# Altium PCB PCB8.PcbDoc
Units mil, origin at the board's own origin, x right, y up, seen from the top; angles counter-clockwise.
Board outline 3206 x 2037 mil, 2 copper layers (Top Layer, Bottom Layer); 87 components, 65 nets, 274 pads, 64 vias.
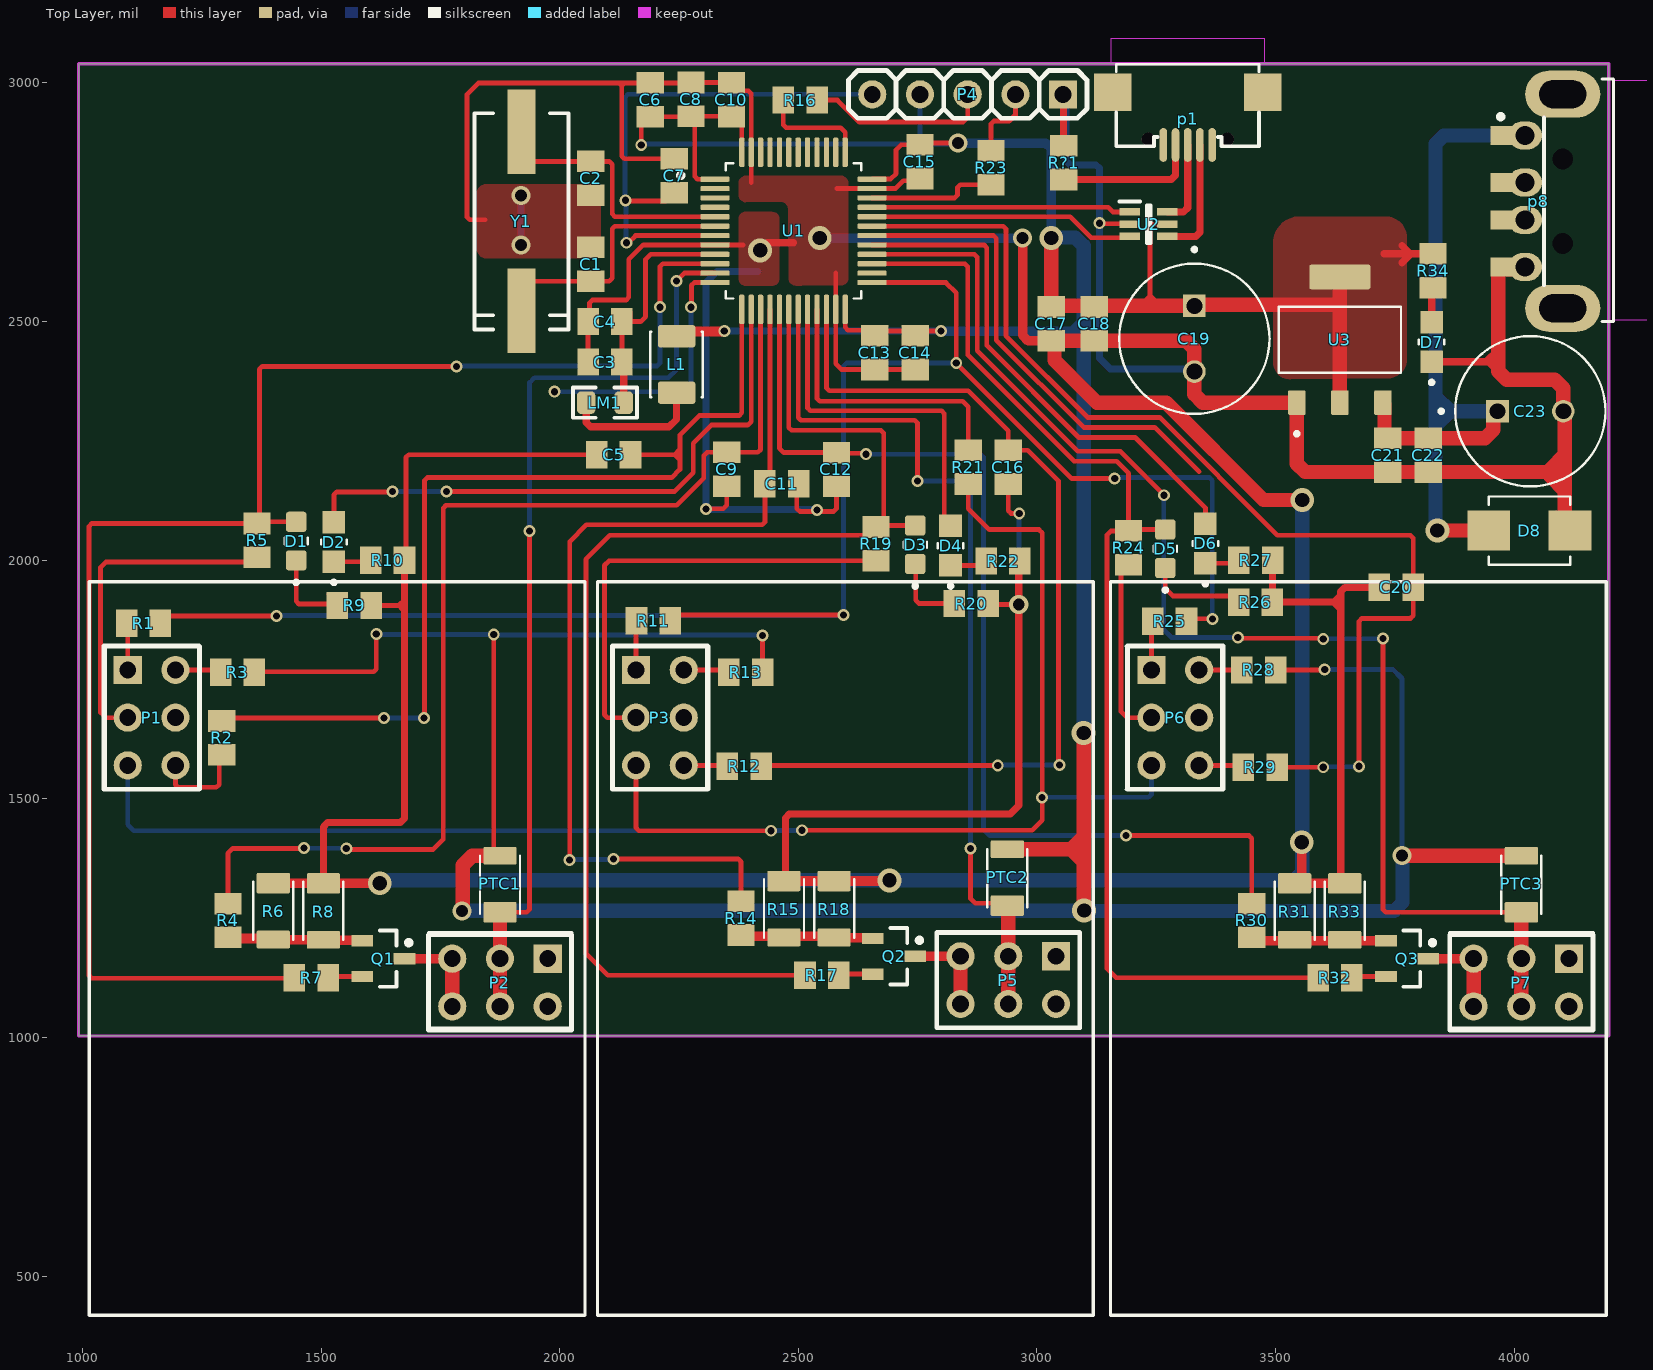
[diagram p0: Top Layer view]
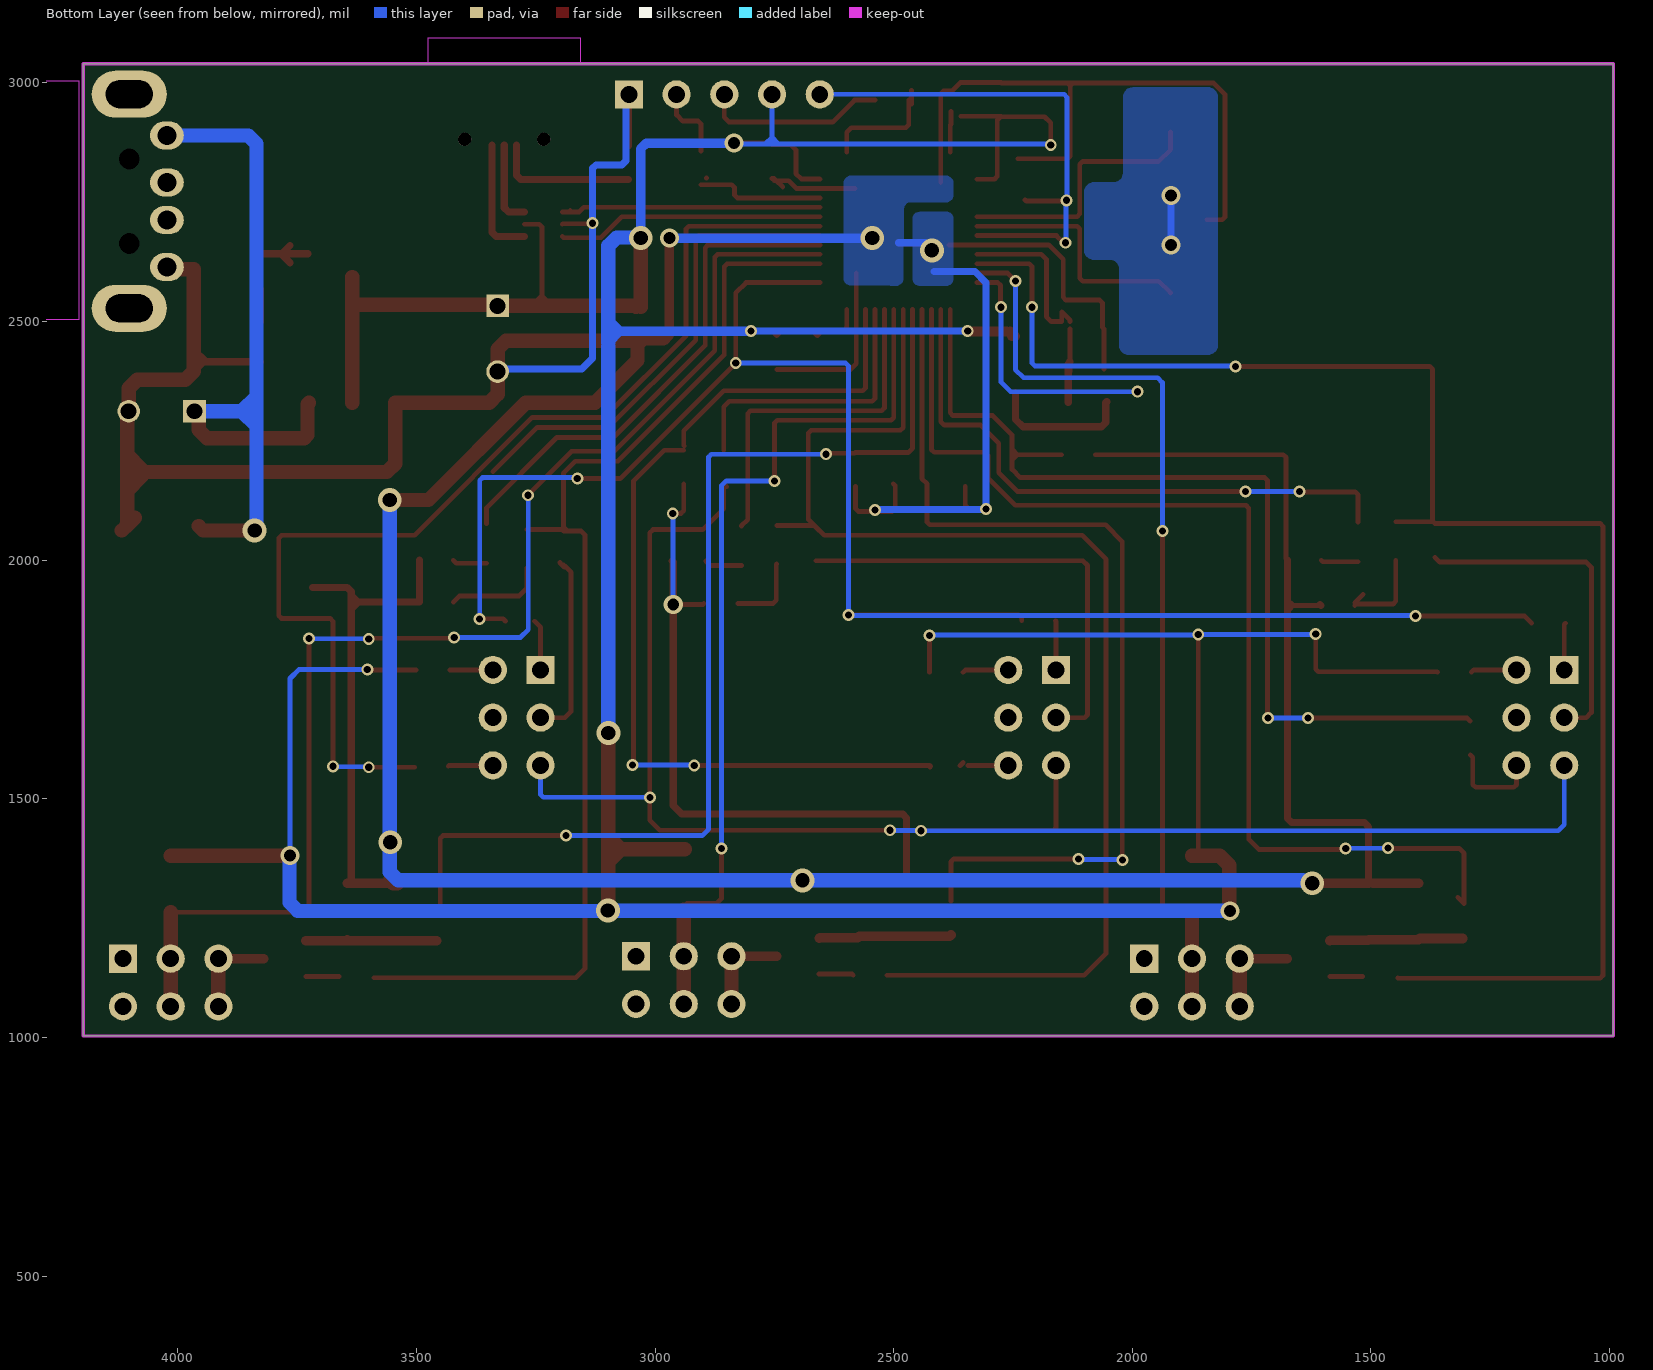
[diagram p1: Bottom Layer view, seen from below]

## Layer stack, top to bottom
Top Solder: solder mask 0.4, Solder Resist, Dk 3.5
Top Layer: signal copper 1.4
Dielectric 1: dielectric 12.6, FR-4, Dk 4.8
Bottom Layer: signal copper 1.4
Bottom Solder: solder mask 0.4, Solder Resist, Dk 3.5

## Board outline
992,1003 992,3040 4198,3040 4198,1003

## Design rules (kind name [scope] priority, off if disabled: settings)
Clearance [All] p1: gap=10 ignorepadtopadclearanceinfootprint=FALSE except(0: Arc-Hole Track-Hole SMDPad-Hole THPad-Hole Via-Hole Fill-Hole Poly-Hole Region-Hole Text-Hole; 5: Arc-SMDPad Track-SMDPad SMDPad-SMDPad; 15: Arc-Poly Track-Poly SMDPad-Poly THPad-Poly Via-Poly Fill-Poly Poly-Poly)
PlaneClearance [All] p1: clearance=15
PlaneConnect [All] p1: planeconnectstyle=Direct reliefexpansion=20 reliefentries=4 reliefconductorwidth=10 reliefairgap=10
PolygonConnect [All] p1: connectstyle=Direct reliefconductorwidth=10 reliefentries=4 polygonreliefangle="90 Angle" airgapwidth=10
RoutingVias [All] p1: holewidth=15 width=25 viastyle="Through Hole" minholewidth=15 minwidth=25 maxholewidth=30 maxwidth=50
SolderMaskExpansion [All] p1: expansion=4 istentingtop=FALSE
Width [All] p1: maxlimit=30 minlimit=10 preferedwidth=10 minimp=50.000000 maximp=50.000000 favimp=50.000000
28 further rules are at their usual default settings.

## Components (designator, comment, footprint, x,y, rotation, side; value= is the part's Value field where it differs from the comment)
C1 "Cap" CAPC2012X140N 2065,2620 r90 top value=30uF (schematic designator C7)
C2 "Cap" CAPC2012X140N 2065,2800 r270 top value=30uF (schematic designator C6)
C3 "Cap" CAPC2012X140N 2095,2415 r0 top value=10nF (schematic designator C4)
C4 "Cap" CAPC2012X140N 2095,2500 r0 top value=100nF (schematic designator C5)
C5 "Cap" CAPC2012X140N 2113,2221 r0 top value=10pF (schematic designator C26)
C6 "Cap" CAPC2012X140N 2190,2964.57 r270 top value=4.7uF (schematic designator C13)
C7 "Cap" CAPC2012X140N 2240,2805.43 r90 top value=10nF (schematic designator C30)
C8 "Cap" CAPC2012X140N 2275,2965.43 r270 top value=100nF (schematic designator C9)
C9 "0.1uF" CAPC2012X140N 2350,2190.43 r90 top (schematic designator C1)
C10 "Cap" CAPC2012X140N 2360,2965 r270 top value=100nF
C11 "0.1uF" CAPC2012X140N 2465.43,2160 r180 top (schematic designator C2)
C12 "0.1uF" CAPC2012X140N 2580,2190 r90 top (schematic designator C3)
C13 "Cap" CAPC2012X140N 2660,2435 r90 top value=100nF (schematic designator C12)
C14 "Cap" CAPC2012X140N 2745,2435 r90 top value=100nF (schematic designator C8)
C15 "Cap" CAPC2012X140N 2755,2835 r90 top value=100nF (schematic designator C11)
C16 "Cap" CAPC2012X140N 2940,2195 r270 top value=10nF (schematic designator C20)
C17 "Cap" CAPC2012X140N 3030,2495 r90 top value=10uF (schematic designator C18)
C18 "Cap" CAPC2012X140N 3120,2495 r90 top value=100nF (schematic designator C19)
C19 "EEUFR1C681L" CAPPRD350W60D800H1500 3330,2463.9 r270 top (schematic designator C15)
C20 "Cap" CAPC2012X140N 3753,1943 r0 top value=10pF (schematic designator C29)
C21 "Cap" CAPC2012X140N 3735,2220 r90 top value=100nF (schematic designator C17)
C22 "Cap" CAPC2012X140N 3820,2220 r90 top value=10uF (schematic designator C16)
C23 "EEUFR1C681L" CAPPRD350W60D800H1500 4034,2312 r0 top (schematic designator C14)
D1 "5990110007F" LEDSC125X200X90-2N 1448,2040 r90 top
D2 "Q62702P5179" LED_Q62702P5179 1527,2038 r90 top (schematic designator D7)
D3 "5990110007F" LEDSC125X200X90-2N 2745,2032.35 r90 top (schematic designator D2)
D4 "Q62702P5179" LED_Q62702P5179 2819,2030.34 r90 top (schematic designator D8)
D5 "5990110007F" LEDSC125X200X90-2N 3269,2024 r90 top (schematic designator D3)
D6 "" LED_Q62702P5179 3353,2035 r90 top
D7 "Q62702P5179" LED_Q62702P5179 3827,2457 r90 top (schematic designator D5)
D8 "SMBJ5.0CA" DIOM4336X265N 4032,2062 r180 top (schematic designator D4)
L1 "NLCV32T-2R2M-PF" INDM3225X240N 2245,2410 r270 top value=2µ2
LM1 "10uH" 0805L 2095,2330 r0 top value=FB805
p1 "USB Connector" USB_AB_BM_SHS 3316,2929 r0 top (schematic designator p?)
P1 "Header 3X2" FHDR2X03-254P 1095,1770 r270 top (schematic designator P3)
P2 "Header 3X2" FHDR2X03-254P 1975,1165 r180 top
P3 "Header 3X2" FHDR2X03-254P 2160,1770 r270 top (schematic designator P5)
P4 "MHDR_1X05" MHDR1X05-254P 3055,2976 r180 top (schematic designator P1)
P5 "Header 3X2" FHDR2X03-254P 3040,1170 r180 top (schematic designator P4)
P6 "Header 3X2" FHDR2X03-254P 3240,1770 r270 top
P7 "Header 3X2" FHDR2X03-254P 4115,1165 r180 top
p8 "USB Connector" "USB A TYPE Right Angle" 4208,2752 r0 top
PTC1 "0.65ohm" RESC3115X65N 1875,1320 r90 top
PTC2 "0.65ohm" RESC3115X65N 2938,1333.68 r90 top
PTC3 "0.65ohm" RESC3115X65N 4015,1320 r90 top
Q1 "MOSFET-N" SOT23_N 1630.71,1165 r0 top
Q2 "MOSFET-N" SOT23_N 2700.71,1170 r0 top
Q3 "MOSFET-N" SOT23_N 3775.71,1165 r0 top
R1 "Res1" CAPC2012X140N 1128,1868 r180 top value=150ohm (schematic designator R9)
R2 "Res1" CAPC2012X140N 1292,1627.43 r90 top value=150ohm (schematic designator R7)
R3 "Res1" CAPC2012X140N 1325,1765 r0 top value=4.7K (schematic designator R11)
R4 "1K" CAPC2012X140N 1305,1245 r90 top (schematic designator R2)
R5 "Res1" CAPC2012X140N 1366,2041.43 r90 top value=150ohm (schematic designator R8)
R6 "1ohm" RESC3115X65N 1400,1265.63 r270 top (schematic designator R13)
R7 "Res1" CAPC2012X140N 1479.57,1125 r180 top value=4.7K (schematic designator R10)
R8 "1ohm" RESC3115X65N 1505,1265 r270 top (schematic designator R14)
R9 "Res1" CAPC2012X140N 1569.57,1905 r0 top value=150ohm (schematic designator R12)
R10 "Res1" CAPC2012X140N 1639.57,2000 r180 top value=150ohm (schematic designator R39)
R11 "Res1" CAPC2012X140N 2196.43,1873 r180 top value=150ohm (schematic designator R22)
R12 "Res1" CAPC2012X140N 2387,1568 r0 top value=150ohm (schematic designator R16)
R13 "Res1" CAPC2012X140N 2390,1765 r0 top value=4.7K (schematic designator R21)
R14 "1K" CAPC2012X140N 2380,1250 r90 top (schematic designator R4)
R15 "1ohm" RESC3115X65N 2470,1270 r270 top (schematic designator R26)
R16 "22ohm" CAPC2012X140N 2504,2964 r0 top (schematic designator R3)
R17 "Res1" CAPC2012X140N 2549.57,1130 r180 top value=4.7K (schematic designator R23)
R18 "1ohm" RESC3115X65N 2575,1270 r270 top (schematic designator R25)
R19 "Res1" CAPC2012X140N 2663,2034 r90 top value=150ohm (schematic designator R17)
R20 "Res1" CAPC2012X140N 2862.43,1909 r180 top value=150ohm (schematic designator R24)
R21 "Res1" CAPC2012X140N 2856,2195 r90 top value=150ohm (schematic designator R15)
R22 "Res1" CAPC2012X140N 2929,1998 r180 top value=150ohm (schematic designator R40)
R23 "22ohm" CAPC2012X140N 2904,2822 r90 top (schematic designator R1)
R24 "Res1" CAPC2012X140N 3192,2026 r90 top value=150ohm (schematic designator R29)
R25 "Res1" CAPC2012X140N 3278,1872 r180 top value=150ohm (schematic designator R30)
R26 "Res1" CAPC2012X140N 3458,1912 r180 top value=150ohm (schematic designator R32)
R27 "Res1" CAPC2012X140N 3458.43,2000 r180 top value=150ohm (schematic designator R38)
R28 "Res1" CAPC2012X140N 3465,1770 r0 top value=4.7K (schematic designator R31)
R29 "Res1" CAPC2012X140N 3468,1566 r0 top value=150ohm (schematic designator R28)
R30 "1K" CAPC2012X140N 3450,1245 r90 top (schematic designator R5)
R31 "1ohm" RESC3115X65N 3540,1265 r270 top (schematic designator R35)
R32 "Res1" CAPC2012X140N 3624.57,1125 r180 top value=4.7K (schematic designator R33)
R33 "1ohm" RESC3115X65N 3645,1265 r270 top (schematic designator R34)
R34 "Res1" CAPC2012X140N 3830,2606.57 r270 top value=150ohm (schematic designator R37)
R?1 "Res1" CAPC2012X140N 3056,2833 r90 top value=10K (schematic designator R?)
U1 "STM32F103C8T6" QFP50P900X900X160-48N 2490,2690 r0 top
U2 "USBUF02W6" SOT65P210X110-6N 3234,2704 r0 top
U3 "AMS1117-3.3" SOT229P700X180-4N 3634.84,2461.69 r90 top
Y1 "XTAL" "Crystal SMD" 1920,2710 r90 top

## Footprints (in the part's own frame and the unit in brackets; to place one, negate y for a bottom-side part, rotate by r counter-clockwise, add the part's x,y. Pads: shape width x height; smd on the part's side, far side on the other; paste and mask are expansions set on the pad)
0805L [mm] ",0805, 2012, 200X130"
  rrect50% 1x1.2 smd mask+0.075: 1(-1,0) 2(1,0)
  Top Layer pour cut-out: -0.5,0.8 0.5,0.8 0.5,-0.8 -0.5,-0.8
  silkscreen extent -1.7,-0.8 1.7,0.8, body extent -1,-0.6 1,0.6, height 0.95
CAPC2012X140N [mm]
  rect 1.15x1.45 smd: 1(-0.9,0) 2(0.9,0)
  body extent -1,-0.63 1,0.63, height 0.94
CAPPRD350W60D800H1500 [mm]
  round 1.2 hole 0.85: N(1.75,0)
  rect 1.2x1.2 / inner round 1.2 / far side rect 1.2x1.2 hole 0.85: P(-1.75,0)
  silkscreen extent -4.85,-4 4,4, body extent -4,-4 4,4, height 15
"Crystal SMD" [mm]
  rect 4.5x1.5 smd: 1(-4.763,0) 2(4.763,0)
  silkscreen extent -5.75,-2.5 5.75,2.5, body extent -6.94,-2.5 6.96,2.5, height 4.5
DIOM4336X265N [mm]
  rect 2.28x2.12 smd: 1(-2.165,0) 2(2.165,0)
  silkscreen extent -2.16,-1.81 2.16,1.81, body extent -2.68,-1.81 2.68,1.81, height 2.65
FHDR2X03-254P [mm] "Female Header 2X03 with 2.54 mm Pitch"
  rect 1.5x1.5 hole 0.9: 1(0,0)
  round 1.5 hole 0.9: 2(0,2.54) 3(2.54,0) 4(2.54,2.54) 5(5.08,0) 6(5.08,2.54)
  silkscreen extent -1.27,-1.27 6.35,3.81
INDM3225X240N [mm] "Molded Inductor, 2-Leads, Body 3.2x2.5mm, IPC Medium Density"
  round 0.508 on Mech15: 0(0,0)
  rrect25% 1.2x2 smd: 1(-1.5,0) 2(1.5,0)
  silkscreen extent -1.75,-1.4 1.75,1.4, body extent -1.79,-1.35 1.79,1.35, height 2.4
LED_Q62702P5179 [mm]
  rect 1.2x1.2 smd: 1(-1.05,0) 2(1.05,0)
  silkscreen extent -2.25,-0.67 0.13,0.67, body extent -1,-0.65 1,0.65, height 0.8
LEDSC125X200X90-2N [mm]
  rrect25% 1.07x1.08 smd: A(1.025,0) C(-1.025,0)
  silkscreen extent -2.3,-0.63 0.17,0.63, body extent -1,-0.63 1,0.63, height 0.7
MHDR1X05-254P [mm] "Male Header 1X05 with 2.54 mm Pitch"
  rect 1.5x1.5 hole 0.9: 1(0,0)
  round 1.5 hole 0.9: 2(2.54,0) 3(5.08,0) 4(7.62,0) 5(10.16,0)
  silkscreen extent -1.27,-1.27 11.43,1.27, body extent -1.27,-1.27 11.43,1.27, height 8.43
QFP50P900X900X160-48N [mm]
  rrect50% 1.56x0.28 smd: 1(-4.18,2.75) 2(-4.18,2.25) 3(-4.18,1.75) 4(-4.18,1.25) 5(-4.18,0.75) 6(-4.18,0.25) 7(-4.18,-0.25) 8(-4.18,-0.75) 9(-4.18,-1.25) 10(-4.18,-1.75) 11(-4.18,-2.25) 12(-4.18,-2.75) 25(4.18,-2.75) 26(4.18,-2.25) 27(4.18,-1.75) 28(4.18,-1.25) 29(4.18,-0.75) 30(4.18,-0.25) 31(4.18,0.25) 32(4.18,0.75) 33(4.18,1.25) 34(4.18,1.75) 35(4.18,2.25) 36(4.18,2.75)
  rrect50% 0.28x1.56 smd: 13(-2.75,-4.18) 14(-2.25,-4.18) 15(-1.75,-4.18) 16(-1.25,-4.18) 17(-0.75,-4.18) 18(-0.25,-4.18) 19(0.25,-4.18) 20(0.75,-4.18) 21(1.25,-4.18) 22(1.75,-4.18) 23(2.25,-4.18) 24(2.75,-4.18) 37(2.75,4.18) 38(2.25,4.18) 39(1.75,4.18) 40(1.25,4.18) 41(0.75,4.18) 42(0.25,4.18) 43(-0.25,4.18) 44(-0.75,4.18) 45(-1.25,4.18) 46(-1.75,4.18) 47(-2.25,4.18) 48(-2.75,4.18)
  silkscreen extent -6.15,-3.6 3.6,3.6, body extent -4.5,-4.5 4.5,4.5, height 1.6
RESC3115X65N [mm]
  rrect14% 1.09x1.77 smd: 1(-1.465,0)
  rrect14% 0.94x1.77 smd: 2(1.54,0)
  silkscreen extent -1.55,-1.06 1.55,1.06
SOT23_N [mm] "SOT23, 3-Leads, Body 2.9x1.3mm, Pitch 0.95mm, Lead Span 2.3mm - Reverse Pinning, IPC Medium Density"
  rect 1.15x0.6 smd: 1(1.125,0) 2(-1.125,-0.95) 3(-1.125,0.95)
  silkscreen extent -0.2,-1.5 1.48,1.5, body extent -0.7,-1.5 0.7,1.5, height 1.1
SOT65P210X110-6N [mm]
  rect 1.1x0.4 smd: 1(-1,0.65) 2(-1,0) 3(-1,-0.65) 4(1,-0.65) 5(1,0) 6(1,0.65)
  silkscreen extent -1.55,-1 0.1,1.2
SOT229P700X180-4N [mm]
  rrect15% 1.31x0.93 smd: 1(-3.345,2.29) 2(-3.345,0) 3(-3.345,-2.29)
  rrect15% 1.31x3.24 smd: 4(3.345,0)
  silkscreen extent -5.1,-3.25 1.75,3.25, body extent -3.5,-3.25 3.5,3.25, height 1.8
"USB A TYPE Right Angle" [mm] "Connector; USB1.1, Type A, SM; 4 Position; Right Angle DESIGNER ABBAS BASEREH"
  rect 2.5x1 smd: 1(-5.3,3.5) 2(-5.3,1) 3(-5.3,-1) 4(-5.3,-3.5)
  oval 1.8x1.5 hole 1: 1(-4.7,3.5) 2(-4.7,1) 3(-4.7,-1) 4(-4.7,-3.5)
  oval 4x2.5 hole 1.5 slot 2.5 at 0 deg: 5(-2.7,-5.7) 6(-2.7,5.7)
  round 0.8 hole 1.1 unplated: MH1(-2.7,-2.25) MH2(-2.7,2.25)
  Keep-Out Layer board cut-out: 0,6.4 0,-6.3 15.3,-6.3 15.3,6.4
  silkscreen extent -6.12,-6.4 0,6.5, body extent -4.9,-6.3 15.1,6.3, height 3.45
USB_AB_BM_SHS [mm] "USB Micro AB - Standard (Bottom mount), Shell SMT DESIGNER ABBAS BASEREH"
  oval 0.4x1.8 smd: 1(1.3,-1.5) 2(0.65,-1.5) 3(0,-1.5) 4(-0.65,-1.5) 5(-1.3,-1.5)
  rect 2x2 smd: 6(-4,1.3) 6(4,1.3)
  round 0.7 hole 0.7: H(-2.1,-1.2) H(2.1,-1.2)
  Keep-Out Layer board cut-out: -4.064,2.8 -4.064,4.191 4.064,4.191 4.064,2.8
  silkscreen extent -3.8,-1.57 3.8,2.8, body extent -4,-1.88 4,4.16, height 2.75

## Part data
C1 C2 C3 C4 C5 C6 C7 C8 C10 C13 C14 C15 C16 C17 C18 C20 C21 C22: "Capacitor", LatestRevisionDate=17-Jul-2002, LatestRevisionNote="Re-released for DXP Platform.", PackageDescription="Radial Cap, Thru-Hole; 2 Leads; 0.3 in Pin Spacing", PackageReference=RAD-0.3, Published=8-Jun-2000, Publisher="Altium Limited"
C9 C11 C12: library part "CAP SMD 0805", "CAP 0805", Data=16-12-2016, Desc.="CAP SMD 0805", Designer="Abbas Basereh"
C19 C23: "680ÂµF 16V Aluminum Electrolytic Capacitors Radial, Can 8000 Hrs @ 105Â°C", Package="RADIAL-2 Panasonic", Availability="In Stock", Check_prices=https://www.snapeda.com/parts/EEUFR1C681L/Panasonic/view-part/?ref=eda, MF=Panasonic, MP=EEUFR1C681L, Price=None, Purchase-URL=https://pricing.snapeda.com/search/part/EEUFR1C681L/?ref=eda, SnapEDA_Link=https://www.snapeda.com/parts/EEUFR1C681L/Panasonic/view-part/?ref=snap
D1 D3 D5: "Red 633nm LED Indication - Discrete 2.1V 0805 (2012 Metric)", Package="0805 Dialight", Availability="In Stock", Check_prices=https://www.snapeda.com/parts/599-0110-007F/Dialight/view-part/?ref=eda, MF=Dialight, MP=599-0110-007F, Price=None, Purchase-URL=https://pricing.snapeda.com/search/part/599-0110-007F/?ref=eda, SnapEDA_Link=https://www.snapeda.com/parts/599-0110-007F/Dialight/view-part/?ref=snap
D2 D4 D7: "LED Uni-Color Green 572nm 2-Pin SMD T/R", Package="0805 Osram Opto", Availability="In Stock", Check_prices=https://www.snapeda.com/parts/Q62702P5179/Osram+Opto/view-part/?ref=eda, MF="Osram Opto", MP=Q62702P5179, Price=None, SnapEDA_Link=https://www.snapeda.com/parts/Q62702P5179/Osram+Opto/view-part/?ref=snap
D6: library part Q62702P5179, "LED Uni-Color Green 572nm 2-Pin SMD T/R", Package="0805 Osram Opto", Availability="In Stock", Check_prices=https://www.snapeda.com/parts/Q62702P5179/Osram+Opto/view-part/?ref=eda, MF="Osram Opto", MP=Q62702P5179, Price=None, SnapEDA_Link=https://www.snapeda.com/parts/Q62702P5179/Osram+Opto/view-part/?ref=snap
D8: "600W, 6.7V, 5%, Bidirectional, TVS", Package="SMB Taiwan Semiconductor", Availability="In Stock", Check_prices=https://www.snapeda.com/parts/SMBJ5.0CA/Taiwan+Semiconductor/view-part/?ref=eda, MF="Taiwan Semiconductor", MP=SMBJ5.0CA, Price=None, Purchase-URL=https://pricing.snapeda.com/search/part/SMBJ5.0CA/?ref=eda, SnapEDA_Link=https://www.snapeda.com/parts/SMBJ5.0CA/Taiwan+Semiconductor/view-part/?ref=snap
L1: library part "Inductor 2.2µH 770mA 1210", "2.2µH Unshielded Wirewound Inductor 770mA 169 mOhm Max 1210 (3225 Metric)", DC Resistance (DCR)="169 mOhm", Frequency - Self Resonant=68MHz, Frequency - Test=7.96MHz, Manufacturer 1="TDK Corporation", Operating Temperature="-40°C ~ 125°C", Package / Case="1210 (3225 Metric)", Q @ Freq="15 @ 7.96MHz", Tolerance=±20%, ComponentLink1Description=http://www.digikey.com/products/en/inductors-coils-chokes/4, ComponentLink1URL=http://www.digikey.com/products/en/inductors-coils-chokes/4, Manufacturer Part Number 1=NLCV32T-2R2M-PF, SCDType=source, Supplier 1=Digi-Key, Type="Ferrite Core"
LM1: library part "L SMA 0.25W", "Inductor", Code_IEC=1005, Code_JEITA=0402, LatestRevisionDate=29-May-2009, LatestRevisionNote="IPC-7351 Footprint Added.", PackageDescription="Chip Inductor", PackageReference=0402-A, Published=8-Jun-2000, Publisher="Altium Limited"
p1: library part "USB AB MICRO CONNECTOR", "USB MICRO-B Type Connector", Max Current=1600mA, Category=Connector, ComponentLink1Description=Datasheet, ComponentLink2Description=Reference, Designer="ABBAS BASEREH", Mounting Technology="Surface Mount\Through-Hole", Pin Count=5-7, Publisher="ABBAS BASEREH", Status=Unreleased, Update=1395-11-17
P1 P2 P3 P5 P6 P7: "Header, 3-Pin, Dual row", LatestRevisionDate=17-Jul-2002, LatestRevisionNote="Re-released for DXP Platform.", Publisher="Altium Limited"
P4: "Male Header 1X05"
p8: library part "USB A CONNECTOR", "USB Connector-A Type", Max Current=600mA, Category=Connector, ComponentLink1Description=Datasheet, ComponentLink2Description=Reference, Designer="ABBAS BASEREH", Mounting Technology="Surface Mount\Through-Hole", Pin Count=4-6, Publisher="ABBAS BASEREH", Status=Unreleased, Update=1395-11-17
PTC1 PTC2 PTC3 R6 R8 R15 R18 R31 R33: library part "RES 1206 0.25W", "RES 1206", Data=16-12-2016, Desc.="RES SMD 1206", Designer="Abbas Basereh"
Q1 Q2 Q3: "N-Channel MOSFET", LatestRevisionDate=17-Jul-2002, LatestRevisionNote="Re-released for DXP Platform.", PackageDescription="TO, Flat Index; 3 In-Line, Axial Leads; Body Dia. 4.6mm; Lead Dia. 0.5 mm (max)", PackageReference=E3, PackageVersion=1995/1996, Published=8-Jun-2000, Publisher="Altium Limited"
R1 R2 R3 R5 R7 R9 R10 R11 R12 R13 R17 R19 R20 R21 R22 R24 R25 R26 R27 R28 R29 R32 R34 R?1: "Resistor", LatestRevisionDate=17-Jul-2002, LatestRevisionNote="Re-released for DXP Platform.", PackageDescription="Axial Device, Thru-Hole; 2 Leads; 0.3 in Pin Spacing", PackageReference=AXIAL-0.3, Published=8-Jun-2000, Publisher="Altium Limited"
R4 R14 R16 R23 R30: library part "RES 0805 0.125W", "RES 0805", Data=16-12-2016, Desc.="RES SMD 0805", Designer="Abbas Basereh"
U1: "ARMÂ® CortexÂ®-M3 STM32F1 Microcontroller IC 32-Bit 72MHz 64KB (64K x 8) FLASH 48-LQFP (7x7)", Package="LQFP-48 STMicroelectronics", Availability="In Stock", Check_prices=https://www.snapeda.com/parts/STM32F103C8T6/STMicroelectronics/view-part/?ref=eda, MF=STMicroelectronics, MP=STM32F103C8T6, Price=None, Purchase-URL=https://pricing.snapeda.com/search/part/STM32F103C8T6/?ref=eda, SnapEDA_Link=https://www.snapeda.com/parts/STM32F103C8T6/STMicroelectronics/view-part/?ref=snap
U2: Manufacturer_Name=STMicroelectronics, Mouser Part Number=511-USBUF02W6, Arrow Part Number=USBUF02W6, Arrow Price/Stock=https://www.arrow.com/en/products/usbuf02w6/stmicroelectronics?region=nac, Datasheet Link=http://www.st.com/web/en/resource/technical/document/datasheet/CD00002046.pdf, Geometry.Height=1.1mm, Manufacturer_Part_Number=USBUF02W6, Mouser Price/Stock=https://www.mouser.co.uk/ProductDetail/STMicroelectronics/USBUF02W6?qs=po45yt2pPpsSshudxXreiQ%3D%3D
U3: "Sot223/Pkg 1-Amp 3.3-Volt Low Drop Out Voltage Regulatator", Package="SOT-223 Seeed Technology", Availability="Not in stock", Check_prices=https://www.snapeda.com/parts/AMS1117-3.3/Advanced+Monolithic+Systems/view-part/?ref=eda, MF="Advanced Monolithic Systems", MP=AMS1117-3.3, Price=None, SnapEDA_Link=https://www.snapeda.com/parts/AMS1117-3.3/Advanced+Monolithic+Systems/view-part/?ref=snap
Y1: "Crystal Oscillator", LatestRevisionDate=17-Jul-2002, LatestRevisionNote="Re-released for DXP Platform.", PackageDescription="Crystal, Thru-Hole; 2 Leads; Body 3.1 x 8.2 mm (Dia.xH)", PackageReference=R38, Published=8-Jun-2000, Publisher="Altium Limited"

## Via types
v1: diameter 25, hole 15, Top Layer to Bottom Layer, 47 vias
v2: diameter 50, hole 30, Top Layer to Bottom Layer, 10 vias
v3: diameter 40, hole 25, Top Layer to Bottom Layer, 7 vias

## Nets (pads, with @x,y where several pads share a name; then routed paths per layer and width w, separated by ;. In a path a pad name is that pad's centre, name@x,y a point inside that pad or via, vN(x,y) a via of type N, cw(c..) or ccw(c..) an arc to the next point about the centre after c; other vN are vias at no path point)
ADC1: Q3.3 R30.1 R31.2 R33.2 | length 277
  Top Layer w20: R30.1@3457.17,1202.4 R33.2@3646.97,1202.4 ; R33.2 R33.2@3646.97,1202.4 ; Q3.3 R33.2@3646.97,1202.4
ADC1-M: C12.2 R30.2 U1.17 | length 2212.6
  Top Layer w10: U1.17 2460.47,2234.53 2469.57,2225.43 C12.2 2581.43,2224 2640,2224 v1(2642,2222) ; v1(3187,1423) 3444.14,1423 3450,1417.14 R30.2
  Bottom Layer w10: v1(2642,2222) 2882,2222 2888,2216 2888,1436 2901,1423 v1(3187,1423)
ADC2: Q1.3 R4.1 R6.2 R8.2 | length 281.2
  Top Layer w20: R4.1@1307.28,1207.28 1397.72,1207.28 R6.2 1400.31,1204.69 1504.68,1204.69 R8.2 1505.98,1203.39 1585.43,1203.39 Q1.3
ADC2-M: C9.2 R4.2 U1.15 | length 2320.8
  Top Layer w10: R4.2@1318,1293.43 R4.2 1305,1386 1315,1396 1463,1396 v1(1464,1397) ; v1(1553,1396) 1555,1394 1735.11,1394 1756,1414.89 1756,2109.14 1761.86,2115 2245,2115 2302,2172 2302,2219 2308.87,2225.87 C9.2 2415.24,2225.87 2421.1,2231.72 U1.15
  Bottom Layer w10: v1(1464,1397) 1464.5,1396.5 1552.5,1396.5 v1(1553,1396)
ADC3: Q2.3 R14.1 R15.2 R18.2 | length 279.4
  Top Layer w20: R14.1 2382.6,1211.97 2572.4,1211.97 R18.2 2575.98,1208.39 2655.43,1208.39 Q2.3
ADC3-M: C11.2 R14.2 U1.16 | length 1987.9
  Top Layer w10: v1(2021,1372) 2021,2039 2056,2074 2424.14,2074 2430,2079.86 C11.2 2440.79,2170.79 U1.16 ; v1(2113,1374) 2374.14,1374 2380,1368.14 R14.2
  Bottom Layer w10: v1(2021,1372) 2022,1373 2112,1373 v1(2113,1374)
Boot: R1.1 R11.1 R25.1 U1.25 | length 3889
  Top Layer w10: R1.1 1178.43,1883 v1(1407,1883) ; R11.1 2231.87,1878.91 2237.96,1885 v1(2595,1885) ; U1.25 2809.27,2581.73 2831,2560 v1(2831,2413) 3073,2171 v1(3163,2171) ; R25.1 3318.43,1877 v1(3368,1877)
  Bottom Layer w10: v1(1407,1883) 1408,1884 2594,1884 v1(2595,1885) 2595,2407.14 2600.86,2413 v1(2831,2413) ; v1(3163,2171) 3165,2173 3361.44,2173 3367.3,2167.14 v1@3367.3,1877.7
DNeg: p1.2 U2.4 | length 254.6
  Top Layer w15: U2.4 3332.8,2678.41 3341.59,2687.2 p1.2
DPos: p1.3 U2.6 | length 177.8
  Top Layer w15: U2.6 3307.21,2729.59 3316,2738.38 p1.3
EN1: D5.A R24.2 R32.2 U1.27 | length 2433.5
  Top Layer w10: U1.27 2849.14,2621.1 2855,2615.24 2855,2430 3078,2207 3167,2207 3192,2182 R24.2@3192,2065.43 ; R24.2@3188,2065.43 R24.2 3191.57,2061 3188,2061 3155,2061 3147,2053 3147,1144 3166,1125 R32.2 ; R24.2@3193.08,2064.35 D5.A
EN2: D1.A R5.2 R7.2 U1.10 | length 3294.8
  Top Layer w10: R5.2@1371,2081.87 1371,2400.14 1376.86,2406 v1(1784,2406) ; R7.2 1443.13,1124 1019.86,1124 1014,1129.86 1014,2071.01 1019.86,2076.87 R5.2 1369.49,2080.35 D1.A ; v1(2210,2530) 2210,2615.24 2215.86,2621.1 U1.10
  Bottom Layer w10: v1(1784,2406) 1785,2407 2204.14,2407 2210,2412.86 v1(2210,2530)
EN3: D3.A R17.2 R19.2 U1.18 | length 2678.1
  Top Layer w10: U1.18 2480.16,2277.86 2486.02,2272 2673.14,2272 2679,2266.14 2679,2085.43 R19.2 ; R17.2 2101,1130 2055,1176 2055,2002 2105,2052 2645.57,2052 R19.2 ; D3.A 2666.28,2072.71 R19.2
FD1: P7.3 P7.4 PTC3.1 U1.28 | length 2742.7
  Top Layer w10: U1.28 2869.14,2640.79 2875,2634.93 2875,2439 3086,2228 3175,2228 3266,2137 v1(3266,2136) ; v1(3421,1838) 3422.5,1836.5 3598.5,1836.5 v1(3600,1835) ; v1(3725,1836) 3725,1268.18 3730.86,1262.32 PTC3.1
  Top Layer w30: P7.4 P7.3 PTC3.1
  Bottom Layer w10: v1(3266,2136) 3266,1854 3282,1838 v1(3421,1838) ; v1(3600,1835) 3600.5,1835.5 3724.5,1835.5 v1(3725,1836)
FD2: P2.3 P2.4 PTC1.1 U1.11 | length 1958.1
  Top Layer w10: PTC1.1 1931.14,1262.32 1937,1268.18 v1(1937,2061) ; v1(2245,2585) 2261.42,2601.42 U1.11
  Top Layer w30: P2.4 P2.3 PTC1.1
  Bottom Layer w10: v1(1937,2061) 1937,2372.14 1946.86,2382 2228,2382 2245,2399 v1(2245,2585)
FD3: P5.3 P5.4 PTC2.1 U1.19 | length 1863.6
  Top Layer w10: U1.19 2499.84,2298.86 2505.7,2293 2744.14,2293 2750,2287.14 v1(2750,2166) ; v1(2861,1396) 2861,1290.86 2870.86,1281 2933,1281 PTC2.1
  Top Layer w30: P5.4 P5.3 PTC2.1@2940,1267.32
  Bottom Layer w10: v1(2750,2166) 2851.14,2166 2861,2156.14 v1(2861,1396)
GND: C1.2 C2.2 C3.1 C4.1 C5.1 C6.1 C7.2 C8.1 C9.1 C10.1 C11.1 C12.1 C13.1 C14.1 C15.1 C16.2 C17.1 C18.1 C19.N C20.1 C21.1 C22.1 C23.N D7.1 D8.1 P4.1 p8.4 R6.1 R8.1 R9.2 R10.1 R15.1 R18.1 R20.1 R22.1 R26.1 R27.1 R31.1 R33.1 R?1.2 U1.8 U1.23 U1.35 U1.47 U2.2 U3.1 | length 15950.7
  Top Layer w10: R9.2 1663,1905 ; 1670.5,1897.5 1663,1905 ; 1675,1889 1675,1893 ; 1675,1902 1672,1905 1663,1905 ; 1675,1917 1663,1905 ; R10.1 1678,2003 1678,2215.14 1683.86,2221 C5.1 ; 1844,2713 1811.86,2713 1806,2718.86 1806,2976 1830,3000 2124,3000 ; C3.1@2059.57,2400 C3.1 2059.57,2485 2062.69,2488.12 2062.69,2539.14 2068.54,2545 2139.14,2545 2145,2550.86 2145,2630 2175.47,2660.47 U1.8 2384.53,2660.47 ; C7.2 2135.86,2840.87 2130,2846.72 2130,2994 ; v1(2307,2107) 2307.87,2107.87 2343.01,2107.87 2350,2114.86 C9.1 ; 2401.42,2791.42 U1.47 2401.42,2977.74 2395.56,2983.6 2377.27,2983.6 2360,3000.87 C8.1 2274.13,3000 C6.1 2136,3000 ; C11.1 2497,2156.13 2497,2107.99 2502.86,2102.13 2536.13,2102.13 v1(2539,2105) 2541.87,2102.13 2574.14,2102.13 2580,2107.99 C12.1 ; 2578.58,2601.42 U1.23 2578.58,2411.42 2590.43,2399.57 C13.1 C14.1 ; 2581.42,2778.58 U1.35 2703.58,2778.58 2720,2795 C15.1@2745.8,2795 ; C15.1@2732.73,2781.93 C15.1@2745.8,2795 ; C15.1@2750.43,2795 C15.1@2745.8,2795 ; C15.1 2750.37,2799.57 C15.1@2745.8,2795 ; R20.1 2899.87,1907 v3@2950,1907 ; C16.2 2940,2103.86 2945.86,2098 v1(2963,2098) ; v3@2962,1897 2960,1897 v3@2950,1907 ; v3(2962,1907) v3@2950,1907 ; v3@2962,1919 v3@2950,1907 ; v1(3131,2706) 3132,2705 3193.63,2705 U2.2 ; 2124,3000 2136,3000 ; 2124,3000 2130,2994 ; 2130,2994 2136,3000
  Top Layer w15: R8.1 1505,1441.21 1513.79,1450 1666.21,1450 1675,1458.79 1675,1889 ; R9.2 R9.2@1607.08,1907.08 ; 1675,1893 1675,1902 1675,1917 R10.1 ; v2@2435,2665 2490,2665 ; R15.1 2473,1330.68 2473,1460 2481,1468 2944,1468 2962,1486 2962,1897 v3(2962,1907) 2962,1919 2962,1995.57 R22.1 ; P4.1 3056,2975 R?1.2 ; R27.1 3493.87,1912.43 R26.1 3623,1912 ; R33.1@3630,1322.68 3636.79,1329.46 3636.79,1898.21 ; C20.1 3645.57,1943 3636.79,1934.21 3636.79,1923.61 ; D7.1 3941,2415.66 ; 3966.91,2395.57 3946.82,2415.66 ; 3966.91,2415.66 3946.82,2415.66 ; 3966.91,2446 3966.91,2441.57 3941,2415.66 ; 3623,1912 3636.79,1898.21 ; 3623,1912 3635.79,1912 3636.79,1913 ; 3623,1912 3634.61,1923.61 3636.79,1923.61 ; 3636.79,1898.21 3636.79,1913 ; 3636.79,1913 3636.79,1923.61 ; 3941,2415.66 3946.82,2415.66
  Top Layer w20: R6.1 1400.31,1322.99 R8.1@1496.5,1322.99 ; R8.1 v2@1622.68,1322.68 ; R15.1 R18.1 v2@2689.68,1327.68 ; v3@2972,2663 2972,2672.81 v3(2970,2674.81) 2970,2471.28 2981.72,2459.57 C17.1 ; R31.1@3548.54,1322.68 3630,1322.68 R33.1 ; R31.1@3555,1329.13 v2(3555,1409)
  Top Layer w30: v2@2689.68,1327.68 v2(2691,1329) ; C17.1 3037,2452.57 3037,2419 3126,2330 3271,2330 3475,2126 v2(3556,2126) ; C17.1@3040,2459.57 C18.1 3312.43,2459.57 3330,2441.99 C19.N 3330,2347.57 3347.57,2330 U3.1 3544.68,2202.14 3562.26,2184.57 C21.1 C22.1 4075,2184.57 ; R31.1 3548.54,1322.68 R31.1@3555,1329.13 ; p8.4@3999.34,2614.2 3994.65,2609.52 3966.91,2609.52 3966.91,2441.57 3966.91,2415.66 3966.91,2395.57 3984.48,2378 4085.32,2378 4102.9,2360.43 C23.N 4106.2,2308.7 4106.2,2220.76 ; D8.1@4090.5,2088.73 D8.1@4106.2,2073.04 ; D8.1 D8.1@4106.2,2073.04 ; 4075,2184.57 4075,2176.2 4106.2,2145 ; 4075,2184.57 4102.63,2184.57 4106.2,2181 ; 4075,2184.57 4075,2189.57 4106.2,2220.76 ; D8.1@4106.2,2073.04 4106.2,2145 ; 4106.2,2145 4106.2,2181 ; 4106.2,2181 4106.2,2220.76
  Bottom Layer w10: v3(2962,1907) 2962.5,1907.5 2962.5,2097.5 v1(2963,2098)
  Bottom Layer w15: v3(1919,2660) v3(1919,2764) ; 2415,2605 2330,2605 2307,2582 v1(2307,2107) 2308,2106 2538,2106 v1(2539,2105) ; v2@2435,2665 2490,2665 ; P4.1 3061,2970 3061,2837 3070,2828 3124,2828 3131,2821 v1(3131,2706) 3131,2423 3153.55,2400.45 3324.55,2400.45 C19.N
  Bottom Layer w20: v2(2545,2675) 2545.19,2674.81 v3(2970,2674.81)
  Bottom Layer w30: v2(1623,1323) 1626.83,1326.83 1640.97,1326.83 1643.14,1329 v2(2691,1329) 3538.43,1329 3556,1346.57 3556,1408 v2(3555,1409) 3556,1410 v2(3556,2126)
  other v2: 2420,2649
Green1: D6.2 U1.29 | length 1080
  Top Layer w10: U1.29 2889.14,2660.47 2895,2654.61 2895,2450 3088,2257 3206,2257 3353,2110 D6.2
Green2: D2.2 U1.14 | length 1267
  Top Layer w10: D2.2 1527,2137 1532.86,2142.86 1648.86,2142.86 v1(1650,2144) ; v1(1763,2144) 2241,2144 2280,2183 2280,2245 2318,2283 2394,2283 2401.42,2290.42 U1.14
  Bottom Layer w10: v1(1650,2144) v1(1763,2144)
Green3: D4.2 U1.20 | length 738.8
  Top Layer w10: U1.20 2519.53,2318.86 2525.39,2313 2800.14,2313 2806,2307.14 2806,2084.68 D4.2
NetC6_1: C2.1 U1.5 Y1.2 | length 562.2
  Top Layer w10: Y1.2 1920,2859.96 1944.53,2835.43 C2.1 2104.14,2835.43 2110,2829.58 2110,2725.39 2115.86,2719.53 U1.5
NetC7_1: C1.1 U1.6 Y1.1 | length 524
  Top Layer w10: Y1.1@1920,2560.04 1944.53,2584.57 2104.14,2584.57 2110,2590.42 2110,2693.98 2115.86,2699.84 U1.6
NetD1_C: D1.C R9.1 | length 200.5
  Top Layer w10: D1.C 1448,1913.86 1453.86,1908 1531.13,1908 R9.1 ; R9.1@1516.5,1928.54 R9.1@1534.09,1910.95
NetD2_C: D3.C R20.2 | length 160.3
  Top Layer w10: D3.C 2746,1991 2746,1916 2753,1909 R20.2
NetD3_C: D5.C R26.2 | length 208.2
  Top Layer w10: D5.C 3269,1941 3285,1925 3409.57,1925 R26.2
NetD5_2: D7.2 R34.2 | length 148.1
  Top Layer w10: D7.2 3830,2501.34 R34.2
  Top Layer w15: D7.2 3827,2568.13 R34.2
NetD6_1: D6.1 R27.2 | length 72.6
  Top Layer w10: D6.1 3416.66,1993.66 R27.2
NetD7_1: D2.1 R10.2 | length 78.5
  Top Layer w10: D2.1 1600.8,1996.66 R10.2
NetD8_1: D4.1 R22.2 | length 78.3
  Top Layer w10: D4.1 2884.57,1989 R22.2
NetL1_2: L1.2 LM1.1 | length 300.1
  Top Layer w15: LM1.1@2053.6,2332.03 LM1.1 2055.63,2288.16 2064.42,2279.37 2229.37,2279.37 2245,2295 L1.2
NetP1_2: P4.2 R23.2 | length 158.5
  Top Layer w10: R23.2 2904,2914.14 2909.86,2920 2942,2920 2955,2933 P4.2
NetP1_3: P4.3 R16.2 | length 386.8
  Top Layer w10: R16.2 2582,2964 2628,2918 2845,2918 2855,2928 P4.3
NetP2_5: P2.5 P2.6 Q1.1 | length 200
  Top Layer w20: Q1.1 P2.5
  Top Layer w30: P2.6 P2.5
NetP3_1: P1.1 R1.2 | length 99
  Top Layer w10: R1.2 1095,1865.57 P1.1
NetP3_2: P1.2 R3.1 | length 104.1
  Top Layer w10: P1.2 1204,1761 1213,1770 1284.57,1770 R3.1
NetP3_3: P1.3 R5.1 | length 702.3
  Top Layer w10: P1.3 1049,1670 1038,1681 1038,1985.14 1048.86,1996 1356,1996 R5.1
NetP3_6: P1.6 R2.1 | length 201
  Top Layer w10: P1.6 1195,1529.86 1200.86,1524 1280.71,1524 1286.57,1529.86 1286.57,1586.57 R2.1
NetP4_5: P5.5 P5.6 Q2.1 | length 195
  Top Layer w20: Q2.1 P5.5
  Top Layer w30: P5.6 P5.5
NetP5_1: P3.1 R11.2 | length 103.4
  Top Layer w10: P3.1 2160,1872 R11.2
NetP5_2: P3.2 R13.1 | length 96.6
  Top Layer w10: P3.2 2349.57,1770 R13.1
NetP5_3: P3.3 R19.1 | length 954.5
  Top Layer w10: P3.3 2099.86,1670 2094,1675.86 2094,1989 2103.57,1998.57 R19.1
NetP5_6: P3.6 R12.1 | length 95
  Top Layer w10: P3.6 R12.1@2345.13,1570 ; R12.1@2354.13,1576 R12.1@2361.13,1569
NetP6_1: P6.1 R25.2 | length 107.2
  Top Layer w10: P6.1 3240,1859.43 R25.2@3252.57,1872
NetP6_2: P6.2 R28.1 | length 89.6
  Top Layer w10: P6.2 R28.1
NetP6_3: P6.3 R24.1 | length 396.9
  Top Layer w10: R24.1@3190,1985.57 R24.1@3199.43,1995 ; R24.1 3188.5,1987.07 3176,1974.57 3176,1683 3189,1670 P6.3
NetP6_6: P6.6 R29.1 | length 94.4
  Top Layer w10: P6.6 3431.57,1570 R29.1@3433.57,1568
NetP7_5: P7.5 P7.6 Q3.1 | length 195
  Top Layer w20: Q3.1 P7.5
  Top Layer w30: P7.6 P7.5
Netp?_4: p1.4 R?1.1 | length 301.6
  Top Layer w15: R?1.1 3281.62,2797.57 3290.41,2806.35 p1.4
NetQ1_2: Q1.2 R7.1 | length 68.8
  Top Layer w10: R7.1@1517.6,1127.6 Q1.2
NetQ2_2: Q2.2 R17.1 | length 72.5
  Top Layer w10: R17.1 2587.6,1132.6 Q2.2
NetQ3_2: Q3.2 R32.1 | length 68.8
  Top Layer w10: R32.1@3662.6,1127.6 Q3.2
RST: C7.1 P4.5 U1.7 | length 1107.1
  Top Layer w10: v1(2138,2754) 2139.64,2752.36 2222.36,2752.36 C7.1@2224.84,2754.84 ; v1(2140,2665) 2144.06,2665 2159.22,2680.16 U1.7
  Bottom Layer w10: v1(2140,2665) 2139,2666 2139,2753 2137,2755 2137,2970.14 2142.86,2976 P4.5
SWCLK: R16.1 U1.37 | length 268
  Top Layer w10: R16.1@2462,2957.43 R16.1 2468.57,2911.86 2474.42,2906 2589,2906 2598.27,2896.73 U1.37 ; R16.1@2463,2956 R16.1@2463,2984.43
SWDIO: R23.1 U1.34 | length 270.9
  Top Layer w10: U1.34 2827.71,2758.9 2833.57,2764.76 2833.57,2780.71 2839.42,2786.57 R23.1 ; R23.1@2892.57,2800.43 R23.1@2893,2800
UART1_Rx: C20.2 R29.2 U1.31 | length 2293
  Top Layer w10: U1.31 2929.14,2699.84 2935,2693.98 2935,2470 3106,2299 3257,2299 3504,2052 3782.58,2052 3788.43,2046.14 C20.2 3788.43,1883.86 3782.58,1878 3680.86,1878 3675,1872.14 v1(3675,1568) ; R29.2 v1(3600,1566)
  Bottom Layer w10: v1(3600,1566) 3601,1567 3674,1567 v1(3675,1568)
UART1_Tx: U1.30 | length 1015.3
  Top Layer w10: U1.30 2909.14,2680.16 2915,2674.3 2915,2461 3098,2278 3247,2278 3339.88,2185.12
UART2_Rx: C5.2 R2.2 U1.13 | length 2042
  Top Layer w10: R2.2 1298.13,1669 v1(1632,1669) ; v1@1717,1669 1717,2167.14 1722.86,2173 2235,2173 2252,2190 2252,2210 ; C5.2 2241,2221 ; U1.13 2381.73,2308.86 2375.87,2303 2293,2303 2252,2262 2252,2232 ; 2241,2221 2252,2210 ; 2241,2221 2251,2221 2252,2222 ; 2241,2221 2252,2232 ; 2252,2210 2252,2222 ; 2252,2222 2252,2232
  Bottom Layer w10: v1(1632,1669) v1(1716,1669)
UART2_Tx: U1.12 | length 549.5
  Top Layer w10: v1(2275,2530) 2276,2531 2276,2575.87 2281.86,2581.73 U1.12
  Bottom Layer w10: v1(1989,2353) 2255.14,2353 2275,2372.86 v1(2275,2530)
UART3_Rx: C16.1 R12.2 U1.22 | length 1970.4
  Top Layer w10: R12.2@2424,1566.43 R12.2 2424.43,1570 v1(2918,1570) ; U1.22 2558.9,2360.86 2564.76,2355 2856.14,2355 2939.93,2271.21 2939.93,2240.36 C16.1@2939,2239.43 ; C16.1 2980.57,2230.43 3045,2166 3045,1573 v1(3047,1571)
  Bottom Layer w10: v1(2918,1570) 2918.5,1570.5 3046.5,1570.5 v1(3047,1571)
UART3_Tx: R21.2 U1.21 | length 601.5
  Top Layer w10: U1.21 2539.21,2338.86 2545.07,2333 2844.28,2333 2856,2321.28 R21.2
UART3_Tx_ESP: P1.5 P3.5 P6.5 R21.1 | length 3601.9
  Top Layer w10: P3.5 2160,1438.86 2165.86,1433 v1(2443,1433) ; v1(2508,1434) 2990,1434 3011,1455 v1(3011,1503) 3011,2057.14 3004.14,2064 2900,2064 2856,2108 R21.1 R21.1@2850,2153.57
  Bottom Layer w10: P1.5 1095,1446 1108,1433 v1(2443,1433) 2443.5,1433.5 2507.5,1433.5 v1(2508,1434) ; v1(3011,1503) 3234.14,1503 3240,1508.86 P6.5
USB_DM: U1.32 U2.3 | length 559.5
  Top Layer w10: U1.32 3069.47,2719.53 3113.46,2675.54 3191.76,2675.54 U2.3
USB_DP: U1.33 U2.1 | length 561.9
  Top Layer w10: U1.33 3149.6,2739.21 3159.22,2729.59 U2.1@3180.85,2729.59 ; U2.1@3177.98,2732.46 U2.1@3180.85,2729.59 ; U2.1@3180.85,2729.59 U2.1 U2.1@3180.85,2729.59
Vdd-3.3V: C6.2 C8.2 C10.2 C13.2 C14.2 C15.2 C17.2 C18.2 C19.P L1.1 P4.4 PTC1.2 PTC2.2 PTC3.2 R3.2 R13.2 R28.2 R34.1 U1.1 U1.24 U1.36 U1.48 U2.5 U3.2 | length 11113
  Top Layer w10: R3.2 1361.43,1766 1610.01,1766 1615.87,1771.86 v1(1615.87,1845.13) ; v1(1862,1844) 1862,1393.63 PTC1.2 ; v1(2171,2870) 2171,2916.04 2184.09,2929.13 C6.2 2274.13,2929.13 C8.2 ; L1.1@2253.11,2469.06 2263.1,2479.04 L1.1@2265,2480.94 ; U1.1 2288.86,2798.27 2283,2804.13 2283,2922 C8.2 ; C10.2@2359.57,2930 C8.2 ; C10.2@2380,2940 2380,2913.66 2381.73,2911.93 U1.48 ; v1(2425,1842) 2425,1765.43 R13.2 ; U1.24 2598.27,2487.59 2604.13,2481.73 2648.7,2481.73 C13.2 ; U1.36 2655.08,2798.78 2693.78,2798.78 2705,2810 2705,2860 2715.43,2870.43 C15.2 2758.57,2874 v3(2835,2874) ; C13.2@2659.57,2470 C13.2 ; v1(2799,2480) 2754.57,2480 C14.2 2735.43,2480 2669.57,2480 C13.2 ; 3215,2532.8 3215.8,2532.8 3237,2554 ; 3232,2532.8 3237,2537.8 3237,2554 ; 3251,2532.8 3251,2540 3237,2554 ; U2.5 3242.86,2704 3237,2698.14 3237,2554 ; R28.2 3602,1770 v1(3603,1771) ; 3726,2641 3727,2642
  Top Layer w15: 3727,2642 3782,2642 ; 3765,2623 3782,2640 3782,2642 ; 3765,2659 3782,2642 ; R34.1 3782,2642
  Top Layer w20: L1.1@2253.11,2469.06 L1.1 L1.1@2255.94,2480 ; L1.1@2263.1,2479.04 2344.04,2479.04 v1(2345,2480)
  Top Layer w30: v3(1795,1265) 1796.91,1266.91 1796.91,1360.91 1816.63,1380.63 PTC1.2 ; PTC2.2 3072,1394.31 ; C17.2 v2(3030,2675) ; C17.2@3040,2530.43 3042.36,2532.8 3215,2532.8 ; 3095,1394.31 3072,1394.31 ; v2(3098,1638) 3098,1420.31 ; v2(3099,1266) 3098,1267 3098,1368.31 ; 3215.8,2532.8 3232,2532.8 3251,2532.8 C19.P 3332.2,2535 3634.84,2535 ; U3.2 3634.84,2535 ; 3634.84,2593.39 3634.84,2535 ; v3(3765,1381) 3765.37,1380.63 PTC3.2 ; 3072,1394.31 3098,1420.31 ; 3072,1394.31 3098,1368.31 ; 3098,1368.31 3098,1420.31
  Bottom Layer w10: v1(1615.87,1845.13) 1625.23,1845.13 1626.36,1844 v1(1862,1844) 1863,1843 2424,1843 v1(2425,1842) ; v1(2171,2870) 2173,2872 2744,2872 ; P4.4 2755,2886 ; 2772,2872 2769,2872 ; v3(2835,2874) 2833,2872 2769,2872 ; v1(3603,1771) 3746,1771 3765,1752 v3(3765,1381) ; 2744,2872 2755,2872 ; 2744,2872 2744,2875 2755,2886 ; 2755,2872 2769,2872 ; 2755,2872 2755,2886 ; 2755,2886 2769,2872
  Bottom Layer w15: v1(2345,2480) v1(2799,2480) ; 2900,2874 2902,2876 ; 2920,2874 2922,2874
  Bottom Layer w20: v1(2799,2480) 3074,2480 ; v3(2835,2874) 2900,2874 2920,2874 3018.28,2874 3030,2862.28 v2(3030,2675) ; 3098,2447 3098,2456 3074,2480 ; 3098,2476 3094,2480 3074,2480 ; 3098,2502 3096,2502 3074,2480
  Bottom Layer w30: v3(1795,1265) 1795.5,1265.5 3098.5,1265.5 v2(3099,1266) 3100,1265 3748.43,1265 3766,1282.57 3766,1380 v3(3765,1381) v3@3766,1382 ; v2(3030,2675) 3031,2676 3080.43,2676 3098,2658.43 3098,2502 3098,2476 3098,2456 ; v2(3098,1638) 3098,2447
Vdd-5V: C21.2 C22.2 C23.P D8.2 p8.1 U3.3 | length 1691.6
  Top Layer w30: U3.3 3728.31,2326.69 3728.31,2262.13 C21.2 C22.2 ; C22.2@3825.91,2255.43 3938.91,2255.43 3956.48,2273.01 3956.48,2303.38 C23.P ; v2(3839,2062) D8.2@3945.38,2062 ; D8.2 D8.2@3956.48,2071.72
  Bottom Layer w30: v2(3839,2062) 3835.17,2065.83 3835.17,2079.97 3835,2080.14 3835,2281 ; C23.P 3866,2312 ; p8.1@4022.96,2889.8 3852.57,2889.8 3835,2872.22 3835,2343 ; 3835,2281 3835,2318 ; 3835,2281 3866,2312 ; 3835,2318 3835,2343 ; 3835,2318 3841,2312 3866,2312 ; 3835,2343 3866,2312
VddA: C3.2 C4.2 LM1.2 U1.9 | length 531.7
  Top Layer w10: C3.2@2130.43,2395 C3.2 C4.2@2130.43,2485 ; C4.2 2130.43,2502.36 2148.07,2520 2148.07,2500 2170,2500 2180,2510 2180,2630 2190.79,2640.79 U1.9
  Top Layer w15: C3.2@2131.06,2415.63 C3.2 C3.2@2134.37,2411.06 ; LM1.2 C3.2@2134.37,2411.06 ; C3.2@2135,2410.43 C3.2@2134.37,2411.06
pads on no net: L1.0 p1.1 P1.4 p1.5 p1.6 p1.H P2.1 P2.2 P3.4 P5.1 P5.2 P6.4 P7.1 P7.2 p8.2 p8.3 p8.5 p8.6 p8.MH1 p8.MH2 U1.2 U1.3 U1.4 U1.26 U1.38 U1.39 U1.40 U1.41 U1.42 U1.43 U1.44 U1.45 U1.46 U3.4

## Polygon pours and split planes (outlines as drawn)
GND on Top Layer "GND_L01_P007" (solid, pour order 7): 2086,2766.98 2086,2653 cw(c2066,2653) 2066,2633 1846,2633 cw(c1846,2653) 1826,2653 1826,2768.03 cw(c1845.9,2768.03) 1845.97,2787.93 2065.95,2787.1 cw(c2065.88,2766.98)
GND on Top Layer "GND_L01_P004" (solid, pour order 4): 2445,2730 2390,2730 ccw(c2390,2715) 2375,2715 2375,2590 ccw(c2390,2590) 2390,2575 2445,2575 ccw(c2445,2590) 2460,2590 2460,2715 ccw(c2445,2715)
GND on Top Layer "GND_L01_P002" (solid, pour order 2): 2590.01,2805 2390,2805 ccw(c2390,2790.07) 2375.07,2790.07 2375.07,2764.95 ccw(c2389.69,2764.95) 2389.65,2750.34 2464.79,2750.14 cw(c2464.76,2736.35) 2478.55,2736.48 2479.87,2590 ccw(c2494.59,2590.14) 2494.65,2575.41 2507.39,2575.46 2590.8,2575.77 ccw(c2590.75,2589.95) 2604.93,2589.94 2605.07,2789.93 ccw(c2590.01,2789.94)
Vdd-3.3V on Top Layer "VDD-3.3V_L01_P000" (solid, pour order 0): 3495,2414.74 3495,2665 cw(c3550,2665) 3550,2720 3730.16,2720 cw(c3730,2674.81) 3775.19,2674.81 3775.19,2420.51 cw(c3735.91,2420.51) 3736.41,2381.24 3531.6,2378.61 cw(c3531.14,2414.74)
GND on Bottom Layer "GND_L02_P006" (solid, pour order 6): 2100.35,2649.45 2100.35,2771.49 ccw(c2080.35,2771.49) 2080.35,2791.49 2039.35,2791.49 cw(c2039.35,2811.49) 2019.35,2811.49 2019.35,2970.49 ccw(c1999.35,2970.49) 1999.35,2990.49 1841.35,2990.49 ccw(c1841.35,2970.49) 1821.35,2970.49 1821.35,2450.49 ccw(c1841.35,2450.49) 1841.35,2430.49 2007.35,2430.49 ccw(c2007.35,2450.49) 2027.35,2450.49 2027.35,2609.51 cw(c2047.26,2609.51) 2047.32,2629.42 2080.15,2629.32 ccw(c2080.21,2649.45)
GND on Bottom Layer "GND_L02_P003" (solid, pour order 3): 2445,2730 2390,2730 ccw(c2390,2715) 2375,2715 2375,2590 ccw(c2390,2590) 2390,2575 2445,2575 ccw(c2445,2590) 2460,2590 2460,2715 ccw(c2445,2715)
GND on Bottom Layer "GND_L02_P001" (solid, pour order 1): 2590.01,2805 2390,2805 ccw(c2390,2790.07) 2375.07,2790.07 2375.07,2764.95 ccw(c2389.69,2764.95) 2389.65,2750.34 2464.79,2750.14 cw(c2464.76,2736.35) 2478.55,2736.48 2479.87,2590 ccw(c2494.59,2590.14) 2494.65,2575.41 2507.39,2575.46 2590.8,2575.77 ccw(c2590.75,2589.95) 2604.93,2589.94 2605.07,2789.93 ccw(c2590.01,2789.94)

## Keep-outs
Keep-Out Layer:
  the board outline again, w7

## Silkscreen, mask and mechanical layers (free items; w line width, h text height)
Top Overlay:
  lines w7: 1047.19,1519.5 1247.19,1519.5 1247.19,1819.5 1047.19,1819.5 ; 1047.66,1520.04 1047.66,1820.04 ; 1725.19,1018.5 1725.19,1219.5 ; 1725.66,1019.04 2025.66,1019.04 2025.66,1219.04 1726.66,1219.04 ; 2112.19,1519.5 2312.19,1519.5 2312.19,1819.5 2112.19,1819.5 ; 2112.66,1520.04 2112.66,1820.04 ; 2790.19,1018.5 2790.19,1219.5 ; 2790.66,1019.04 3090.66,1019.04 3090.66,1219.04 2791.66,1219.04 ; 3187.19,1519.5 3387.19,1519.5 3387.19,1819.5 3187.19,1819.5 ; 3187.66,1520.04 3187.66,1820.04 ; 3865.19,1018.5 3865.19,1219.5 ; 3865.66,1019.04 4165.66,1019.04 4165.66,1219.04 3866.66,1219.04 ; 1014.19,417.5 1014.19,1955 2053.19,1955 2053.19,417.5 1014.19,417.5 ; 2079.19,417.5 2079.19,1955 3118.19,1955 3118.19,417.5 2079.19,417.5 ; 3154.19,417.5 3154.19,1955 4193.19,1955 4193.19,417.5 3154.19,417.5

## Text inside footprints (layer, text, board x,y; h text height)
p1: Mechanical 1 "PCB EDGE" at 3221,3049 h27.56
p8: Mechanical 1 "PCB Edge" at 4226.6,2548.35 h9.84 r90